# Altium PCB Major Buzz Kill.PcbDoc (part 2 of 3)
Units mm, origin at the board's own origin, x right, y up, seen from the top; angles counter-clockwise.
Board outline 59.06 x 78.97 mm, 2 copper layers (Top Layer, Bottom Layer); 83 components, 53 nets, 219 pads, 224 vias.
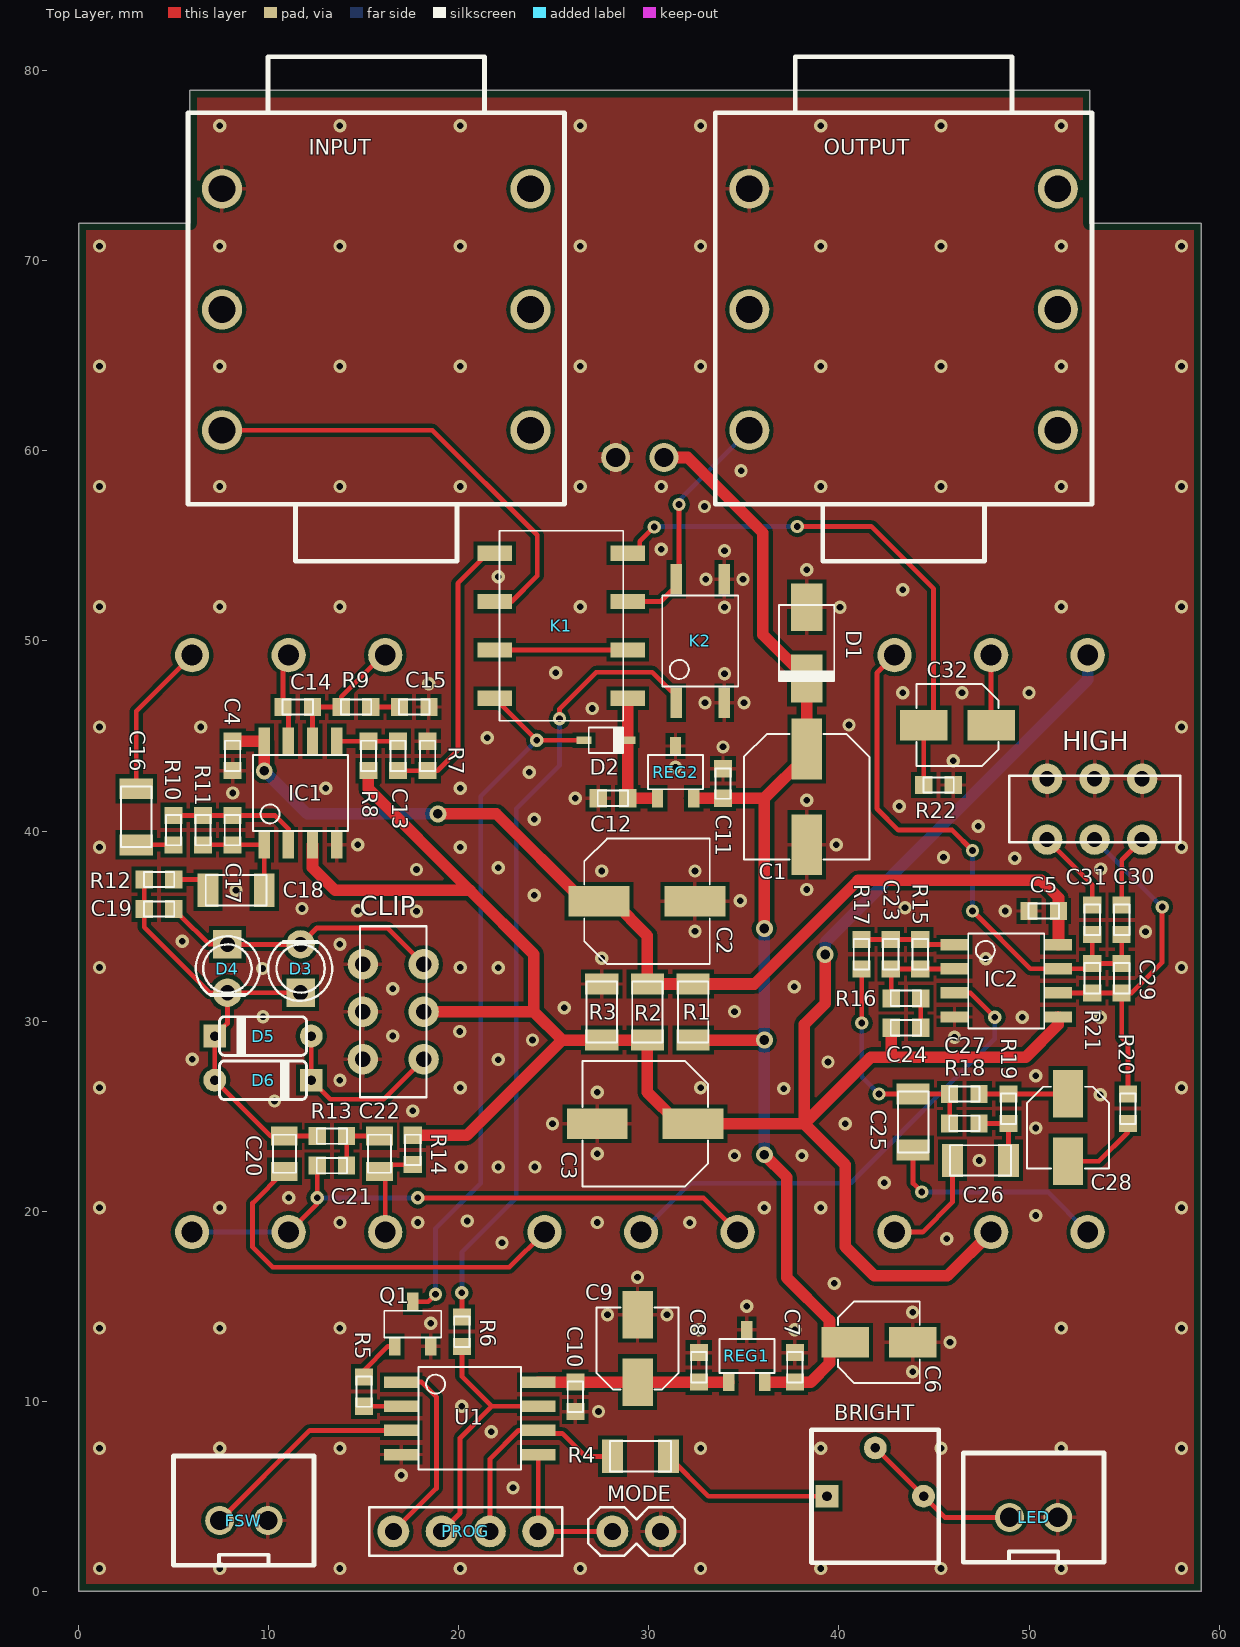
[diagram p0: Top Layer view]

## Part data (continued)
IC1 IC2: library part TL072CDT, "IC OPAMP JFET 4MHZ 8SO", Case/Package=SOIC, Dual Supply Voltage=9V, Input Bias Current=200pA, Input Offset Voltage (Vos)=10mV, Manufacturer=STMicroelectronics, Max Dual Supply Voltage=18V, Max Operating Temperature=70°C, Max Supply Voltage=36V, Min Dual Supply Voltage=3V, Min Operating Temperature=0°C, Min Supply Voltage=6V, Nominal Supply Current=2.5mA, Operating Supply Current=1.4mA, Output Current=40mA, Package Quantity=1, Supplier Part Number 1=1467663, Voltage Gain=106.02dB, Bandwidth=4MHz, Common Mode Rejection Ratio=70dB, ComponentLink1Description=https://datasheet.ciiva.com/15129/getdatasheetpartid-40113-15129688.pdf?src-supplier=Verical, ComponentLink1URL=https://datasheet.ciiva.com/15129/getdatasheetpartid-40113-15129688.pdf?src-supplier=Verical, ComponentLink2Description=https://datasheet.ciiva.com/29306/155616-da-01-en-op-verst-tl072cdt-stm-29306849.pdf?src-supplier=Conrad, ComponentLink2URL=https://datasheet.ciiva.com/29306/155616-da-01-en-op-verst-tl072cdt-stm-29306849.pdf?src-supplier=Conrad, ComponentLink3Description=https://datasheet.ciiva.com/26847/tl072cdt-26847276.pdf?src-supplier=IIIC, ComponentLink3URL=https://datasheet.ciiva.com/26847/tl072cdt-26847276.pdf?src-supplier=IIIC, ComponentLink4Description=https://datasheet.ciiva.com/1795/cd00000490-1795664.pdf?src-supplier=Digi-Key, ComponentLink4URL=https://datasheet.ciiva.com/1795/cd00000490-1795664.pdf?src-supplier=Digi-Key, ComponentLink5Description=https://datasheet.ciiva.com/1795/cd00000490-1795665.pdf?src-supplier=Digi-Key, ComponentLink5URL=https://datasheet.ciiva.com/1795/cd00000490-1795665.pdf?src-supplier=Digi-Key, ComponentLink6Description=https://datasheet.ciiva.com/1795/cd00000490-1795666.pdf?src-supplier=Digi-Key, ComponentLink6URL=https://datasheet.ciiva.com/1795/cd00000490-1795666.pdf?src-supplier=Digi-Key, ComponentLink7Description=https://datasheet.ciiva.com/8008/1674510-8008556.pdf?src-supplier=Element14, ComponentLink7URL=https://datasheet.ciiva.com/8008/1674510-8008556.pdf?src-supplier=Element14, ComponentLink8Description=https://datasheet.ciiva.com/14151/tl072-tl072a-tl072b-st-tds-eng-14151196.pdf?src-supplier=Distrelec, ComponentLink8URL=https://datasheet.ciiva.com/14151/tl072-tl072a-tl072b-st-tds-eng-14151196.pdf?src-supplier=Distrelec, ComponentLink9Description=https://datasheet.ciiva.com/8008/1674510-8008557.pdf?src-supplier=Element14, ComponentLink9URL=https://datasheet.ciiva.com/8008/1674510-8008557.pdf?src-supplier=Element14, Contact Plating=Tin, Gain Bandwidth Product=4MHz, Height=1.25mm, Lead Free="Lead Free", Length=4.9mm, Manufacturer Part Number=TL072CDT, Mount="Surface Mount", Number of Amplifiers=2, Number of Channels=2, Number of Circuits=2, Number of Elements=2, Number of Pins=8, Operating Supply Voltage=18V, Output Current per Channel=40mA, Packaging="Tape and Reel", Price=0.351, Pricing="5=0.351, 50=0.313, 100=0.188, 500=0.167, 1000=0.145 (EUR)", Radiation Hardening=No, REACH SVHC="No SVHC", RoHS=Yes, Slew Rate=16V/µs, Stock=1760, Supplier 1=Farnell, Unity Gain Bandwidth Product=4MHz, Weight=0.01lb, Width=3.9mm
INPUT OUTPUT: "6.35mm stereo insulated socket jack PCB mounted", Price=0.5
K1: library part G6K-2F5DC, "OMRON - G6K-2F 5DC - RELAY, SIGNAL, DPDT, 30VDC, 1A", Case/Package=SMD/SMT, Coil Current=21.1mA, Coil Power=100mW, Coil Resistance=237R, Coil Voltage (DC)=5V, Contact Current Rating=1A, Contact Resistance=100mR, Insulation Resistance=1GR, Manufacturer=Cliff, Max Operating Temperature=70°C, Min Operating Temperature=-40°C, Supplier Part Number 1=4446185, Coil Type=Non-Latching, ComponentLink1Description=https://datasheet.ciiva.com/1524/1702879-1524968.pdf?src-supplier=Element14, ComponentLink1URL=https://datasheet.ciiva.com/1524/1702879-1524968.pdf?src-supplier=Element14, Contact Material=Gold, Current Rating=21.1mA, Depth=7.8mm, Height=5.2mm, Length=10mm, Manufacturer Part Number=G6K-2F5DC, Mount=PCB, Number of Poles=2, Power Rating=100mW, Price=2.68, REACH SVHC=Unknown, Release Time=1.3ms, RoHS=Yes, Stock=0, Supplier 1=Farnell, Termination=SMD/SMT, Width=10mm
K2: "Toshiba TLP175A AC Input MOSFET Output Optocoupler, Surface Mount, 4-Pin SOIC", Case/Package=SOIC, Isolation Voltage=3.75kV, Manufacturer=Toshiba, Max Input Current=80mA, Supplier Part Number 1=2524257, ComponentLink1Description=http://www.farnell.com/datasheets/2017792.pdf?src-supplier=Farnell, ComponentLink1URL=http://www.farnell.com/datasheets/2017792.pdf?src-supplier=Farnell, ComponentLink2Description=http://uk.rs-online.com/webdocs/129d/0900766b8129d5be.pdf?src-supplier=RSComponents, ComponentLink2URL=http://uk.rs-online.com/webdocs/129d/0900766b8129d5be.pdf?src-supplier=RSComponents, ComponentLink3Description=http://www.farnell.com/datasheets/2017792.pdf?src-supplier=Element14, ComponentLink3URL=http://www.farnell.com/datasheets/2017792.pdf?src-supplier=Element14, ComponentLink4Description=http://www.farnell.com/datasheets/2017792.pdf?src-supplier=Newark, ComponentLink4URL=http://www.farnell.com/datasheets/2017792.pdf?src-supplier=Newark, Fall Time=1ms, Manufacturer Part Number=TLP175A, Mount="Surface Mount", Number of Channels=1, Number of Pins=4, Price=0.829, Pricing="5=0.877, 25=0.717, 100=0.597, 250=0.546, 500=0.49, 1000=0.441 (EUR)", REACH SVHC=Unknown, Rise Time=1ms, RoHS=No, Stock=0, Supplier 1=Farnell
MODE: "2 Pins male header", Pin spacing=2.54mm, Price=0.01
PROG: "4 Pins female header", Pin spacing=2.54mm, Price=0.01
Q1: library part MMBT3904LT1G, "TRANS NPN 40V 0.2A SOT23", Case/Package=SOT-23-3, Collector Base Voltage (VCBO)=60V, Collector Emitter Breakdown Voltage=40V, Collector Emitter Saturation Voltage=300mV, Current Rating=200mA, Emitter Base Voltage (VEBO)=6V, Frequency=300MHz, Manufacturer="ON Semiconductor", Max Operating Temperature=150°C, Max Power Dissipation=300mW, Min Operating Temperature=-55°C, Package Quantity=1, Supplier Part Number 1=1459100, Collector Emitter Voltage (VCEO)=40V, ComponentLink1Description=https://datasheet.ciiva.com/16199/mmbt3904lt1-d-16199009.pdf?src-supplier=Future+Electronics, ComponentLink1URL=https://datasheet.ciiva.com/16199/mmbt3904lt1-d-16199009.pdf?src-supplier=Future+Electronics, ComponentLink2Description=https://datasheet.ciiva.com/4723/mmbt3904lt1-d-113169-4723050.pdf?src-supplier=Mouser, ComponentLink2URL=https://datasheet.ciiva.com/4723/mmbt3904lt1-d-113169-4723050.pdf?src-supplier=Mouser, ComponentLink3Description=https://datasheet.ciiva.com/15138/getdatasheetpartid-53263-15138779.pdf?src-supplier=Verical, ComponentLink3URL=https://datasheet.ciiva.com/15138/getdatasheetpartid-53263-15138779.pdf?src-supplier=Verical, ComponentLink4Description=https://datasheet.ciiva.com/976/mmbt3904lt1-d-976362.pdf?src-supplier=Digi-Key, ComponentLink4URL=https://datasheet.ciiva.com/976/mmbt3904lt1-d-976362.pdf?src-supplier=Digi-Key, ComponentLink5Description=https://datasheet.ciiva.com/16478/mmbt3904lt1-d-16478538.pdf?src-supplier=Avnet+Asia, ComponentLink5URL=https://datasheet.ciiva.com/16478/mmbt3904lt1-d-16478538.pdf?src-supplier=Avnet+Asia, ComponentLink6Description=https://datasheet.ciiva.com/976/mmbt3904lt1-d-976363.pdf?src-supplier=Digi-Key, ComponentLink6URL=https://datasheet.ciiva.com/976/mmbt3904lt1-d-976363.pdf?src-supplier=Digi-Key, ComponentLink7Description=https://datasheet.ciiva.com/11199/mmbt3904lt1-d-11199003.pdf?src-supplier=Avnet, ComponentLink7URL=https://datasheet.ciiva.com/11199/mmbt3904lt1-d-11199003.pdf?src-supplier=Avnet, ComponentLink8Description=https://datasheet.ciiva.com/976/mmbt3904lt1-d-976364.pdf?src-supplier=Digi-Key, ComponentLink8URL=https://datasheet.ciiva.com/976/mmbt3904lt1-d-976364.pdf?src-supplier=Digi-Key, ComponentLink9Description=https://datasheet.ciiva.com/14546/70099530-14546188.pdf?src-supplier=Allied+Electronics, ComponentLink9URL=https://datasheet.ciiva.com/14546/70099530-14546188.pdf?src-supplier=Allied+Electronics, ComponentLink10Description=https://datasheet.ciiva.com/7972/1708269-7972381.pdf?src-supplier=Element14, ComponentLink10URL=https://datasheet.ciiva.com/7972/1708269-7972381.pdf?src-supplier=Element14, ComponentLink11Description=https://datasheet.ciiva.com/22664/1708269-22664159.pdf?src-supplier=Element14, ComponentLink11URL=https://datasheet.ciiva.com/22664/1708269-22664159.pdf?src-supplier=Element14, Contact Plating=Tin, Element Configuration=Single, Gain Bandwidth Product=300MHz, Height=0.94mm, hFE Min=100, Lead Free="Lead Free", Length=2.9mm, Manufacturer Part Number=MMBT3904LT1G, Max Breakdown Voltage=40V, Max Collector Current=200mA, Max Frequency=300MHz, Number of Elements=1, Number of Pins=3, Packaging="Tape and Reel", Polarity=NPN, Power Dissipation=300mW, Price=0.041, Pricing="5=0.119, 50=0.115, 100=0.0414, 500=0.0258, 1500=0.0247 (EUR)", Radiation Hardening=No, REACH SVHC="No SVHC", RoHS=Yes, Stock=165506, Supplier 1=Farnell, Transition Frequency=300MHz, Type="General Purpose", Voltage Rating (DC)=40V, Width=1.3mm
R1: library part CRCW120647R0FKEA, "RES SMD 47 OHM 1% 1/4W 1206", Case/Package=1206, Case Code (Metric)=3216, Manufacturer=Vishay, Max Operating Temperature=155°C, Max Power Dissipation=250mW, Min Operating Temperature=-55°C, Package Quantity=10, Supplier Part Number 1=1470017, Temperature Coefficient=100ppm/°C, Tolerance=1%, Voltage Rating=200V, Case Code (Imperial)=1206, ComponentLink1Description=https://datasheet.ciiva.com/11818/0900766b80d98b5e-11818252.pdf?src-supplier=RSComponents, ComponentLink1URL=https://datasheet.ciiva.com/11818/0900766b80d98b5e-11818252.pdf?src-supplier=RSComponents, ComponentLink2Description=https://datasheet.ciiva.com/2469/dcrcwe3-2469056.pdf?src-supplier=Digi-Key, ComponentLink2URL=https://datasheet.ciiva.com/2469/dcrcwe3-2469056.pdf?src-supplier=Digi-Key, ComponentLink3Description=https://datasheet.ciiva.com/16760/70201119-16760313.pdf?src-supplier=Allied+Electronics, ComponentLink3URL=https://datasheet.ciiva.com/16760/70201119-16760313.pdf?src-supplier=Allied+Electronics, ComponentLink4Description=https://datasheet.ciiva.com/9005/dcrcwe3-9005498.pdf?src-supplier=Avnet, ComponentLink4URL=https://datasheet.ciiva.com/9005/dcrcwe3-9005498.pdf?src-supplier=Avnet, ComponentLink5Description=https://datasheet.ciiva.com/2469/dcrcwe3-2469054.pdf?src-supplier=Digi-Key, ComponentLink5URL=https://datasheet.ciiva.com/2469/dcrcwe3-2469054.pdf?src-supplier=Digi-Key, ComponentLink6Description=https://datasheet.ciiva.com/9005/dcrcwe3-9005502.pdf?src-supplier=Avnet, ComponentLink6URL=https://datasheet.ciiva.com/9005/dcrcwe3-9005502.pdf?src-supplier=Avnet, ComponentLink7Description=https://datasheet.ciiva.com/16435/dcrcw-16435790.pdf?src-supplier=Future+Electronics, ComponentLink7URL=https://datasheet.ciiva.com/16435/dcrcw-16435790.pdf?src-supplier=Future+Electronics, ComponentLink8Description=https://datasheet.ciiva.com/16894/dcrcwe3-16894718.pdf?src-supplier=Avnet+Europe, ComponentLink8URL=https://datasheet.ciiva.com/16894/dcrcwe3-16894718.pdf?src-supplier=Avnet+Europe, ComponentLink9Description=https://datasheet.ciiva.com/7777/1697337-7777594.pdf?src-supplier=Element14, ComponentLink9URL=https://datasheet.ciiva.com/7777/1697337-7777594.pdf?src-supplier=Element14, ComponentLink10Description=https://datasheet.ciiva.com/15159/getdatasheetpartid-67741-15159676.pdf?src-supplier=Verical, ComponentLink10URL=https://datasheet.ciiva.com/15159/getdatasheetpartid-67741-15159676.pdf?src-supplier=Verical, ComponentLink11Description=https://datasheet.ciiva.com/2469/dcrcwe3-2469055.pdf?src-supplier=Digi-Key, ComponentLink11URL=https://datasheet.ciiva.com/2469/dcrcwe3-2469055.pdf?src-supplier=Digi-Key, Composition="Thick Film", Contact Plating=Tin, Depth=1.6mm, Features="Automotive AEC-Q200", Height=0.55mm, Lead Free="Lead Free", Length=3.2mm, Manufacturer Part Number=CRCW120647R0FKEA, Military Standard=Not, Mount="Surface Mount", Number of Terminations=2, Packaging="Tape and Reel", Power Rating=250mW, Price=0.0249, Pricing="10=0.0369, 100=0.0246, 500=0.0205, 1000=0.0135, 2500=0.0108 (EUR)", Radiation Hardening=No, REACH SVHC=Unknown, Resistance=47R, RoHS=Yes, Stock=90018, Supplier 1=Farnell, Termination=SMD/SMT, Voltage Rating (DC)=200V, Weight=0.000353oz, Width=0.063inch
R2 R3: library part CRCW120647K0FKEA, "RES SMD 47K OHM 1% 1/4W 1206", Case/Package=1206, Case Code (Metric)=3216, Manufacturer=Vishay, Max Operating Temperature=155°C, Max Power Dissipation=250mW, Min Operating Temperature=-55°C, Package Quantity=10, Resistance=47kR, Supplier Part Number 1=1470016, Temperature Coefficient=100ppm/°C, Tolerance=1%, Voltage Rating=200V, Case Code (Imperial)=1206, ComponentLink1Description=https://datasheet.ciiva.com/11809/0900766b80d98b5e-11809091.pdf?src-supplier=RSComponents, ComponentLink1URL=https://datasheet.ciiva.com/11809/0900766b80d98b5e-11809091.pdf?src-supplier=RSComponents, ComponentLink2Description=https://datasheet.ciiva.com/16894/dcrcwe3-16894709.pdf?src-supplier=Avnet+Europe, ComponentLink2URL=https://datasheet.ciiva.com/16894/dcrcwe3-16894709.pdf?src-supplier=Avnet+Europe, ComponentLink3Description=https://datasheet.ciiva.com/26316/fld-crcw-e3-data-en-26316470.pdf?src-supplier=Distrelec, ComponentLink3URL=https://datasheet.ciiva.com/26316/fld-crcw-e3-data-en-26316470.pdf?src-supplier=Distrelec, ComponentLink4Description=https://datasheet.ciiva.com/7777/1697337-7777591.pdf?src-supplier=Element14, ComponentLink4URL=https://datasheet.ciiva.com/7777/1697337-7777591.pdf?src-supplier=Element14, ComponentLink5Description=https://datasheet.ciiva.com/7777/125364-7777592.pdf?src-supplier=Element14, ComponentLink5URL=https://datasheet.ciiva.com/7777/125364-7777592.pdf?src-supplier=Element14, ComponentLink6Description=https://datasheet.ciiva.com/16380/dcrcwe3-16380760.pdf?src-supplier=Future+Electronics, ComponentLink6URL=https://datasheet.ciiva.com/16380/dcrcwe3-16380760.pdf?src-supplier=Future+Electronics, ComponentLink7Description=https://datasheet.ciiva.com/2468/dcrcwe3-2468922.pdf?src-supplier=Digi-Key, ComponentLink7URL=https://datasheet.ciiva.com/2468/dcrcwe3-2468922.pdf?src-supplier=Digi-Key, ComponentLink8Description=https://datasheet.ciiva.com/2468/dcrcwe3-2468923.pdf?src-supplier=Digi-Key, ComponentLink8URL=https://datasheet.ciiva.com/2468/dcrcwe3-2468923.pdf?src-supplier=Digi-Key, ComponentLink9Description=https://datasheet.ciiva.com/2468/dcrcwe3-2468924.pdf?src-supplier=Digi-Key, ComponentLink9URL=https://datasheet.ciiva.com/2468/dcrcwe3-2468924.pdf?src-supplier=Digi-Key, ComponentLink10Description=https://datasheet.ciiva.com/7777/1697337-7777484.pdf?src-supplier=Element14, ComponentLink10URL=https://datasheet.ciiva.com/7777/1697337-7777484.pdf?src-supplier=Element14, ComponentLink11Description=https://datasheet.ciiva.com/22868/70201119-22868605.pdf?src-supplier=Allied+Electronics, ComponentLink11URL=https://datasheet.ciiva.com/22868/70201119-22868605.pdf?src-supplier=Allied+Electronics, ComponentLink12Description=https://datasheet.ciiva.com/9006/dcrcwe3-9006431.pdf?src-supplier=Avnet, ComponentLink12URL=https://datasheet.ciiva.com/9006/dcrcwe3-9006431.pdf?src-supplier=Avnet, Composition="Thick Film", Contact Plating=Tin, Depth=1.6mm, Features="Automotive AEC-Q200", Height=0.55mm, Lead Free="Lead Free", Length=3.2mm, Manufacturer Part Number=CRCW120647K0FKEA, Military Standard=Not, Number of Terminations=2, Packaging="Tape and Reel", Power Rating=250mW, Price=0.028, Pricing="10=0.0415, 100=0.0276, 500=0.0231, 1000=0.0135, 2500=0.0116 (EUR)", Radiation Hardening=No, REACH SVHC=Unknown, RoHS=Yes, Stock=31528, Supplier 1=Farnell, Termination=SMD/SMT, Voltage Rating (DC)=200V, Weight=0.000353oz, Width=1.6mm
R4: library part CRCW1206220RFKEA, "RES SMD 220 OHM 1% 1/4W 1206", Case/Package=1206, Case Code (Metric)=3216, Manufacturer=Vishay, Max Operating Temperature=155°C, Max Power Dissipation=250mW, Min Operating Temperature=-55°C, Package Quantity=10, Supplier Part Number 1=2139380, Temperature Coefficient=100ppm/°C, Tolerance=1%, Voltage Rating=200V, Case Code (Imperial)=1206, ComponentLink1Description=https://datasheet.ciiva.com/5550/dcrcwe3-109170-5550679.pdf?src-supplier=Mouser, ComponentLink1URL=https://datasheet.ciiva.com/5550/dcrcwe3-109170-5550679.pdf?src-supplier=Mouser, ComponentLink2Description=https://datasheet.ciiva.com/17166/dcrcwe3-17166378.pdf?src-supplier=Avnet+Europe, ComponentLink2URL=https://datasheet.ciiva.com/17166/dcrcwe3-17166378.pdf?src-supplier=Avnet+Europe, ComponentLink3Description=https://datasheet.ciiva.com/2515/dcrcwe3-2515580.pdf?src-supplier=Digi-Key, ComponentLink3URL=https://datasheet.ciiva.com/2515/dcrcwe3-2515580.pdf?src-supplier=Digi-Key, ComponentLink4Description=https://datasheet.ciiva.com/2515/dcrcwe3-2515581.pdf?src-supplier=Digi-Key, ComponentLink4URL=https://datasheet.ciiva.com/2515/dcrcwe3-2515581.pdf?src-supplier=Digi-Key, ComponentLink5Description=https://datasheet.ciiva.com/2515/dcrcwe3-2515582.pdf?src-supplier=Digi-Key, ComponentLink5URL=https://datasheet.ciiva.com/2515/dcrcwe3-2515582.pdf?src-supplier=Digi-Key, ComponentLink6Description=https://datasheet.ciiva.com/8957/dcrcwe3-8957438.pdf?src-supplier=Avnet, ComponentLink6URL=https://datasheet.ciiva.com/8957/dcrcwe3-8957438.pdf?src-supplier=Avnet, ComponentLink7Description=https://datasheet.ciiva.com/22700/1697337-22700367.pdf?src-supplier=Element14, ComponentLink7URL=https://datasheet.ciiva.com/22700/1697337-22700367.pdf?src-supplier=Element14, ComponentLink8Description=https://datasheet.ciiva.com/26317/fld-crcw-e3-data-en-26317129.pdf?src-supplier=Distrelec, ComponentLink8URL=https://datasheet.ciiva.com/26317/fld-crcw-e3-data-en-26317129.pdf?src-supplier=Distrelec, ComponentLink9Description=https://datasheet.ciiva.com/7800/dcrcwe3-7800651.pdf?src-supplier=Element14, ComponentLink9URL=https://datasheet.ciiva.com/7800/dcrcwe3-7800651.pdf?src-supplier=Element14, ComponentLink10Description=https://datasheet.ciiva.com/22675/1912744-22675103.pdf?src-supplier=Element14, ComponentLink10URL=https://datasheet.ciiva.com/22675/1912744-22675103.pdf?src-supplier=Element14, Composition="Thick Film", Contact Plating=Tin, Depth=1.6mm, Features="Automotive AEC-Q200", Height=0.55mm, Lead Free="Lead Free", Length=3.2mm, Manufacturer Part Number=CRCW1206220RFKEA, Military Standard=Not, Mount="Surface Mount", Number of Terminations=2, Packaging="Tape and Reel", Power Rating=250mW, Price=0.028, Pricing="10=0.0415, 100=0.0276, 500=0.0231, 1000=0.0135, 2500=0.0116 (EUR)", Radiation Hardening=No, REACH SVHC=Unknown, Resistance=220R, RoHS=Yes, Stock=47111, Supplier 1=Farnell, Termination=SMD/SMT, Voltage Rating (DC)=200V, Weight=0.000353oz, Width=1.6mm
R5: library part CRCW060322K0FKEA, "RES SMD 22K OHM 1% 1/10W 0603", Case/Package=0603, Case Code (Metric)=1608, Manufacturer=Vishay, Max Operating Temperature=155°C, Max Power Dissipation=100mW, Min Operating Temperature=-55°C, Package Quantity=10, Resistance=22kR, Supplier Part Number 1=1469779, Temperature Coefficient=100ppm/°C, Tolerance=1%, Voltage Rating=75V, Case Code (Imperial)=0603, ComponentLink1Description=https://datasheet.ciiva.com/11818/0900766b80d98afc-11818177.pdf?src-supplier=RSComponents, ComponentLink1URL=https://datasheet.ciiva.com/11818/0900766b80d98afc-11818177.pdf?src-supplier=RSComponents, ComponentLink2Description=https://datasheet.ciiva.com/15159/getdatasheetpartid-32846-15159349.pdf?src-supplier=Verical, ComponentLink2URL=https://datasheet.ciiva.com/15159/getdatasheetpartid-32846-15159349.pdf?src-supplier=Verical, ComponentLink3Description=https://datasheet.ciiva.com/2466/dcrcwe3-2466263.pdf?src-supplier=Digi-Key, ComponentLink3URL=https://datasheet.ciiva.com/2466/dcrcwe3-2466263.pdf?src-supplier=Digi-Key, ComponentLink4Description=https://datasheet.ciiva.com/7672/1697337-7672871.pdf?src-supplier=Element14, ComponentLink4URL=https://datasheet.ciiva.com/7672/1697337-7672871.pdf?src-supplier=Element14, ComponentLink5Description=https://datasheet.ciiva.com/2466/dcrcwe3-2466264.pdf?src-supplier=Digi-Key, ComponentLink5URL=https://datasheet.ciiva.com/2466/dcrcwe3-2466264.pdf?src-supplier=Digi-Key, ComponentLink6Description=https://datasheet.ciiva.com/7673/1720486-7673144.pdf?src-supplier=Element14, ComponentLink6URL=https://datasheet.ciiva.com/7673/1720486-7673144.pdf?src-supplier=Element14, ComponentLink7Description=https://datasheet.ciiva.com/16427/dcrcwe3-16427336.pdf?src-supplier=Future+Electronics, ComponentLink7URL=https://datasheet.ciiva.com/16427/dcrcwe3-16427336.pdf?src-supplier=Future+Electronics, ComponentLink8Description=https://datasheet.ciiva.com/16893/dcrcwe3-16893896.pdf?src-supplier=Avnet+Europe, ComponentLink8URL=https://datasheet.ciiva.com/16893/dcrcwe3-16893896.pdf?src-supplier=Avnet+Europe, ComponentLink9Description=https://datasheet.ciiva.com/2466/dcrcwe3-2466265.pdf?src-supplier=Digi-Key, ComponentLink9URL=https://datasheet.ciiva.com/2466/dcrcwe3-2466265.pdf?src-supplier=Digi-Key, ComponentLink10Description=https://datasheet.ciiva.com/8339/dcrcwe3-8339961.pdf?src-supplier=Avnet, ComponentLink10URL=https://datasheet.ciiva.com/8339/dcrcwe3-8339961.pdf?src-supplier=Avnet, ComponentLink11Description=https://datasheet.ciiva.com/16767/70201119-16767417.pdf?src-supplier=Allied+Electronics, ComponentLink11URL=https://datasheet.ciiva.com/16767/70201119-16767417.pdf?src-supplier=Allied+Electronics, ComponentLink12Description=https://datasheet.ciiva.com/26314/fld-crcw-e3-data-en-26314666.pdf?src-supplier=Distrelec, ComponentLink12URL=https://datasheet.ciiva.com/26314/fld-crcw-e3-data-en-26314666.pdf?src-supplier=Distrelec, Composition="Thick Film", Contact Plating=Tin, Depth=0.85mm, Features="Automotive AEC-Q200", Height=0.45mm, Lead Free="Lead Free", Length=1.55mm, Manufacturer Part Number=CRCW060322K0FKEA, Military Standard=Not, Mount="Surface Mount", Number of Terminations=2, Packaging="Tape and Reel", Power Rating=100mW, Price=0.013, Pricing="10=0.0169, 100=0.013, 500=0.0113, 1000=0.008 (EUR)", Radiation Hardening=No, REACH SVHC=Unknown, RoHS=Yes, Stock=139047, Supplier 1=Farnell, Termination=SMD/SMT, Voltage Rating (DC)=75V, Weight=7.1E-05oz, Width=0.85mm
R6 R14: library part CRCW06031K00FKEA, "RES SMD 1K OHM 1% 1/10W 0603", Case/Package=0603, Case Code (Metric)=1608, Manufacturer="Vishay Dale", Max Operating Temperature=155°C, Max Power Dissipation=100mW, Min Operating Temperature=-55°C, Package Quantity=10, Resistance=1kR, Supplier Part Number 1=1469740, Temperature Coefficient=100ppm/°C, Tolerance=1%, Voltage Rating=75V, Case Code (Imperial)=0603, ComponentLink1Description=https://datasheet.ciiva.com/11808/0900766b80d98afc-11808625.pdf?src-supplier=RSComponents, ComponentLink1URL=https://datasheet.ciiva.com/11808/0900766b80d98afc-11808625.pdf?src-supplier=RSComponents, ComponentLink2Description=https://datasheet.ciiva.com/2465/dcrcwe3-2465536.pdf?src-supplier=Digi-Key, ComponentLink2URL=https://datasheet.ciiva.com/2465/dcrcwe3-2465536.pdf?src-supplier=Digi-Key, ComponentLink3Description=https://datasheet.ciiva.com/8336/dcrcwe3-8336822.pdf?src-supplier=Avnet, ComponentLink3URL=https://datasheet.ciiva.com/8336/dcrcwe3-8336822.pdf?src-supplier=Avnet, ComponentLink4Description=https://datasheet.ciiva.com/16515/dcrcwe3-16515078.pdf?src-supplier=Avnet+Asia, ComponentLink4URL=https://datasheet.ciiva.com/16515/dcrcwe3-16515078.pdf?src-supplier=Avnet+Asia, ComponentLink5Description=https://datasheet.ciiva.com/46441/1720486-46441622.pdf?src-supplier=Element14, ComponentLink5URL=https://datasheet.ciiva.com/46441/1720486-46441622.pdf?src-supplier=Element14, ComponentLink6Description=https://datasheet.ciiva.com/26316/fld-crcw-e3-data-en-26316551.pdf?src-supplier=Distrelec, ComponentLink6URL=https://datasheet.ciiva.com/26316/fld-crcw-e3-data-en-26316551.pdf?src-supplier=Distrelec, ComponentLink7Description=https://datasheet.ciiva.com/46441/1720486-46441623.pdf?src-supplier=Element14, ComponentLink7URL=https://datasheet.ciiva.com/46441/1720486-46441623.pdf?src-supplier=Element14, ComponentLink8Description=https://datasheet.ciiva.com/46385/1697337-46385497.pdf?src-supplier=Element14, ComponentLink8URL=https://datasheet.ciiva.com/46385/1697337-46385497.pdf?src-supplier=Element14, ComponentLink9Description=https://datasheet.ciiva.com/3257/dcrcwe3-3257132.pdf?src-supplier=Avnet, ComponentLink9URL=https://datasheet.ciiva.com/3257/dcrcwe3-3257132.pdf?src-supplier=Avnet, ComponentLink10Description=https://datasheet.ciiva.com/16199/dcrcwe3-16199053.pdf?src-supplier=Future+Electronics, ComponentLink10URL=https://datasheet.ciiva.com/16199/dcrcwe3-16199053.pdf?src-supplier=Future+Electronics, ComponentLink11Description=https://datasheet.ciiva.com/2465/dcrcwe3-2465534.pdf?src-supplier=Digi-Key, ComponentLink11URL=https://datasheet.ciiva.com/2465/dcrcwe3-2465534.pdf?src-supplier=Digi-Key, ComponentLink12Description=https://datasheet.ciiva.com/16893/dcrcwe3-16893742.pdf?src-supplier=Avnet+Europe, ComponentLink12URL=https://datasheet.ciiva.com/16893/dcrcwe3-16893742.pdf?src-supplier=Avnet+Europe, ComponentLink13Description=https://datasheet.ciiva.com/2465/dcrcwe3-2465535.pdf?src-supplier=Digi-Key, ComponentLink13URL=https://datasheet.ciiva.com/2465/dcrcwe3-2465535.pdf?src-supplier=Digi-Key, Composition="Thick Film", Contact Plating=Tin, Depth=0.85mm, Features="Automotive AEC-Q200", Height=0.45mm, Lead Free="Lead Free", Length=1.55mm, Manufacturer Part Number=CRCW06031K00FKEA, Military Standard=Not, Mount="Surface Mount", Number of Pins=2, Number of Terminations=2, Packaging="Tape and Reel", Power Rating=100mW, Price=0.013, Pricing="10=0.017, 100=0.0131, 500=0.0114, 1000=0.008, 2500=0.0061 (EUR)", Radiation Hardening=No, REACH SVHC=Unknown, RoHS=Yes, Stock=1083345, Supplier 1=Farnell, Termination=SMD/SMT, Voltage Rating (DC)=75V, Weight=7.1E-05oz, Width=0.033inch
R7: library part CRCW060310M0FKEA, "RES SMD 10M OHM 1% 1/10W 0603", Case/Package=0603, Case Code (Metric)=1608, Manufacturer=Vishay, Max Operating Temperature=155°C, Min Operating Temperature=-55°C, Package Quantity=5000, Power Rating=100mW, Resistance=10MR, Supplier Part Number 1=1469750, Temperature Coefficient=100ppm/°C, Tolerance=1%, Voltage Rating=75V, Case Code (Imperial)=0603, ComponentLink1Description=https://datasheet.ciiva.com/11808/0900766b80d98afc-11808549.pdf?src-supplier=RSComponents, ComponentLink1URL=https://datasheet.ciiva.com/11808/0900766b80d98afc-11808549.pdf?src-supplier=RSComponents, ComponentLink2Description=https://datasheet.ciiva.com/26314/fld-crcw-e3-data-en-26314629.pdf?src-supplier=Distrelec, ComponentLink2URL=https://datasheet.ciiva.com/26314/fld-crcw-e3-data-en-26314629.pdf?src-supplier=Distrelec, ComponentLink3Description=https://datasheet.ciiva.com/7673/1697337-7673286.pdf?src-supplier=Element14, ComponentLink3URL=https://datasheet.ciiva.com/7673/1697337-7673286.pdf?src-supplier=Element14, ComponentLink4Description=https://datasheet.ciiva.com/3256/dcrcwe3-3256951.pdf?src-supplier=Avnet, ComponentLink4URL=https://datasheet.ciiva.com/3256/dcrcwe3-3256951.pdf?src-supplier=Avnet, ComponentLink5Description=https://datasheet.ciiva.com/3256/dcrcwe3-3256952.pdf?src-supplier=Avnet, ComponentLink5URL=https://datasheet.ciiva.com/3256/dcrcwe3-3256952.pdf?src-supplier=Avnet, ComponentLink6Description=https://datasheet.ciiva.com/16941/dcrcwe3-16941336.pdf?src-supplier=Avnet+Europe, ComponentLink6URL=https://datasheet.ciiva.com/16941/dcrcwe3-16941336.pdf?src-supplier=Avnet+Europe, ComponentLink7Description=https://datasheet.ciiva.com/16786/70201119-16786489.pdf?src-supplier=Allied+Electronics, ComponentLink7URL=https://datasheet.ciiva.com/16786/70201119-16786489.pdf?src-supplier=Allied+Electronics, ComponentLink8Description=https://datasheet.ciiva.com/5543/dcrcwe3-109170-5543450.pdf?src-supplier=Mouser, ComponentLink8URL=https://datasheet.ciiva.com/5543/dcrcwe3-109170-5543450.pdf?src-supplier=Mouser, ComponentLink9Description=https://datasheet.ciiva.com/7673/1720486-7673454.pdf?src-supplier=Element14, ComponentLink9URL=https://datasheet.ciiva.com/7673/1720486-7673454.pdf?src-supplier=Element14, ComponentLink10Description=https://datasheet.ciiva.com/16200/dcrcwe3-16200110.pdf?src-supplier=Future+Electronics, ComponentLink10URL=https://datasheet.ciiva.com/16200/dcrcwe3-16200110.pdf?src-supplier=Future+Electronics, ComponentLink11Description=https://datasheet.ciiva.com/16515/dcrcwe3-16515022.pdf?src-supplier=Avnet+Asia, ComponentLink11URL=https://datasheet.ciiva.com/16515/dcrcwe3-16515022.pdf?src-supplier=Avnet+Asia, Composition="Thick Film", Contact Plating=Tin, Depth=0.85mm, Height=0.45mm, Lead Free="Lead Free", Length=1.55mm, Manufacturer Part Number=CRCW060310M0FKEA, Military Standard=Not, Mount="Surface Mount", Number of Terminations=2, Packaging="Tape and Reel", Price=0.0093, Pricing="10=0.0112, 100=0.0092, 500=0.0084, 1000=0.0075 (EUR)", Radiation Hardening=No, REACH SVHC=Unknown, RoHS=Yes, Stock=59739, Supplier 1=Farnell, Termination=SMD/SMT, Voltage Rating (DC)=75V, Weight=7.1E-05oz, Width=0.85mm, Working Voltage=75V
R8 R22: library part CRCW06031M00FKEA, "RES SMD 1M OHM 1% 1/10W 0603", Case/Package=0603, Case Code (Metric)=1608, Manufacturer=Vishay, Max Operating Temperature=155°C, Max Power Dissipation=100mW, Min Operating Temperature=-55°C, Package Quantity=10, Resistance=1MR, Supplier Part Number 1=1469746, Temperature Coefficient=100ppm/°C, Tolerance=1%, Voltage Rating=75V, Case Code (Imperial)=0603, ComponentLink1Description=https://datasheet.ciiva.com/11809/0900766b80d98afc-11809074.pdf?src-supplier=RSComponents, ComponentLink1URL=https://datasheet.ciiva.com/11809/0900766b80d98afc-11809074.pdf?src-supplier=RSComponents, ComponentLink2Description=https://datasheet.ciiva.com/26314/fld-crcw-e3-data-en-26314645.pdf?src-supplier=Distrelec, ComponentLink2URL=https://datasheet.ciiva.com/26314/fld-crcw-e3-data-en-26314645.pdf?src-supplier=Distrelec, ComponentLink3Description=https://datasheet.ciiva.com/2465/dcrcwe3-2465549.pdf?src-supplier=Digi-Key, ComponentLink3URL=https://datasheet.ciiva.com/2465/dcrcwe3-2465549.pdf?src-supplier=Digi-Key, ComponentLink4Description=https://datasheet.ciiva.com/16311/dcrcwe3-16311533.pdf?src-supplier=Future+Electronics, ComponentLink4URL=https://datasheet.ciiva.com/16311/dcrcwe3-16311533.pdf?src-supplier=Future+Electronics, ComponentLink5Description=https://datasheet.ciiva.com/2465/dcrcwe3-2465550.pdf?src-supplier=Digi-Key, ComponentLink5URL=https://datasheet.ciiva.com/2465/dcrcwe3-2465550.pdf?src-supplier=Digi-Key, ComponentLink6Description=https://datasheet.ciiva.com/7841/1720486-7841822.pdf?src-supplier=Element14, ComponentLink6URL=https://datasheet.ciiva.com/7841/1720486-7841822.pdf?src-supplier=Element14, ComponentLink7Description=https://datasheet.ciiva.com/2465/dcrcwe3-2465551.pdf?src-supplier=Digi-Key, ComponentLink7URL=https://datasheet.ciiva.com/2465/dcrcwe3-2465551.pdf?src-supplier=Digi-Key, ComponentLink8Description=https://datasheet.ciiva.com/7841/125364-7841823.pdf?src-supplier=Element14, ComponentLink8URL=https://datasheet.ciiva.com/7841/125364-7841823.pdf?src-supplier=Element14, Composition="Thick Film", Contact Plating=Tin, Depth=0.85mm, Features="Automotive AEC-Q200", Height=0.45mm, Lead Free="Lead Free", Length=1.55mm, Manufacturer Part Number=CRCW06031M00FKEA, Military Standard=Not, Mount="Surface Mount", Number of Pins=2, Number of Terminations=2, Packaging="Tape and Reel", Power Rating=100mW, Price=0.0131, Pricing="10=0.0169, 100=0.013, 500=0.0113, 1000=0.008 (EUR)", Radiation Hardening=No, REACH SVHC=Unknown, RoHS=Yes, Stock=118520, Supplier 1=Farnell, Termination=SMD/SMT, Voltage Rating (DC)=75V, Weight=7.1E-05oz, Width=0.85mm
R9: library part CRCW06033K30FKEA, "RES SMD 3.3K OHM 1% 1/10W 0603", Case/Package=0603, Case Code (Metric)=1608, Manufacturer=Vishay, Max Operating Temperature=155°C, Max Power Dissipation=100mW, Min Operating Temperature=-55°C, Package Quantity=10, Resistance=3.3kR, Supplier Part Number 1=1469793, Temperature Coefficient=100ppm/°C, Tolerance=1%, Voltage Rating=75V, Case Code (Imperial)=0603, ComponentLink1Description=https://datasheet.ciiva.com/11808/0900766b80d98afc-11808705.pdf?src-supplier=RSComponents, ComponentLink1URL=https://datasheet.ciiva.com/11808/0900766b80d98afc-11808705.pdf?src-supplier=RSComponents, ComponentLink2Description=https://datasheet.ciiva.com/26314/fld-crcw-e3-data-en-26314711.pdf?src-supplier=Distrelec, ComponentLink2URL=https://datasheet.ciiva.com/26314/fld-crcw-e3-data-en-26314711.pdf?src-supplier=Distrelec, ComponentLink3Description=https://datasheet.ciiva.com/7672/1720486-7672906.pdf?src-supplier=Element14, ComponentLink3URL=https://datasheet.ciiva.com/7672/1720486-7672906.pdf?src-supplier=Element14, ComponentLink4Description=https://datasheet.ciiva.com/7673/1720486-7673146.pdf?src-supplier=Element14, ComponentLink4URL=https://datasheet.ciiva.com/7673/1720486-7673146.pdf?src-supplier=Element14, ComponentLink5Description=https://datasheet.ciiva.com/16200/dcrcwe3-16200585.pdf?src-supplier=Future+Electronics, ComponentLink5URL=https://datasheet.ciiva.com/16200/dcrcwe3-16200585.pdf?src-supplier=Future+Electronics, ComponentLink6Description=https://datasheet.ciiva.com/16893/dcrcw-16893324.pdf?src-supplier=Avnet+Europe, ComponentLink6URL=https://datasheet.ciiva.com/16893/dcrcw-16893324.pdf?src-supplier=Avnet+Europe, Composition="Thick Film", Contact Plating=Tin, Depth=0.85mm, Features="Automotive AEC-Q200", Height=0.45mm, Lead Free="Lead Free", Length=1.55mm, Manufacturer Part Number=CRCW06033K30FKEA, Military Standard=Not, Mount="Surface Mount", Number of Terminations=2, Packaging="Tape and Reel", Power Rating=100mW, Price=0.0131, Pricing="10=0.0171, 100=0.0132, 500=0.0114, 1000=0.0068 (EUR)", Radiation Hardening=No, REACH SVHC=Unknown, RoHS=Yes, Stock=173901, Supplier 1=Farnell, Termination=SMD/SMT, Voltage Rating (DC)=75V, Weight=7.1E-05oz, Width=0.85mm, Working Voltage=75V
R10 R12: library part CRCW060310K0FKEA, "RES SMD 10K OHM 1% 1/10W 0603", Case/Package=0603, Case Code (Metric)=1608, Manufacturer=Vishay, Max Operating Temperature=155°C, Max Power Dissipation=100mW, Min Operating Temperature=-55°C, Package Quantity=10, Resistance=10kR, Supplier Part Number 1=1469748, Temperature Coefficient=100ppm/°C, Tolerance=1%, Voltage Rating=75V, Case Code (Imperial)=0603, ComponentLink1Description=https://datasheet.ciiva.com/11809/0900766b80d98afc-11809037.pdf?src-supplier=RSComponents, ComponentLink1URL=https://datasheet.ciiva.com/11809/0900766b80d98afc-11809037.pdf?src-supplier=RSComponents, ComponentLink2Description=https://datasheet.ciiva.com/16886/dcrcw-16886037.pdf?src-supplier=Avnet+Europe, ComponentLink2URL=https://datasheet.ciiva.com/16886/dcrcw-16886037.pdf?src-supplier=Avnet+Europe, ComponentLink3Description=https://datasheet.ciiva.com/26821/getdatasheetpartid-86831-26821109.pdf?src-supplier=Verical, ComponentLink3URL=https://datasheet.ciiva.com/26821/getdatasheetpartid-86831-26821109.pdf?src-supplier=Verical, ComponentLink4Description=https://datasheet.ciiva.com/16754/70201119-16754710.pdf?src-supplier=Allied+Electronics, ComponentLink4URL=https://datasheet.ciiva.com/16754/70201119-16754710.pdf?src-supplier=Allied+Electronics, ComponentLink5Description=https://datasheet.ciiva.com/16719/70201119-16719704.pdf?src-supplier=Allied+Electronics, ComponentLink5URL=https://datasheet.ciiva.com/16719/70201119-16719704.pdf?src-supplier=Allied+Electronics, ComponentLink6Description=https://datasheet.ciiva.com/2465/dcrcwe3-2465513.pdf?src-supplier=Digi-Key, ComponentLink6URL=https://datasheet.ciiva.com/2465/dcrcwe3-2465513.pdf?src-supplier=Digi-Key, ComponentLink7Description=https://datasheet.ciiva.com/5543/dcrcwe3-109170-5543001.pdf?src-supplier=Mouser, ComponentLink7URL=https://datasheet.ciiva.com/5543/dcrcwe3-109170-5543001.pdf?src-supplier=Mouser, ComponentLink8Description=https://datasheet.ciiva.com/2465/dcrcwe3-2465514.pdf?src-supplier=Digi-Key, ComponentLink8URL=https://datasheet.ciiva.com/2465/dcrcwe3-2465514.pdf?src-supplier=Digi-Key, ComponentLink9Description=https://datasheet.ciiva.com/46385/1697337-46385498.pdf?src-supplier=Element14, ComponentLink9URL=https://datasheet.ciiva.com/46385/1697337-46385498.pdf?src-supplier=Element14, ComponentLink10Description=https://datasheet.ciiva.com/2465/dcrcwe3-2465515.pdf?src-supplier=Digi-Key, ComponentLink10URL=https://datasheet.ciiva.com/2465/dcrcwe3-2465515.pdf?src-supplier=Digi-Key, ComponentLink11Description=https://datasheet.ciiva.com/3256/dcrcwe3-3256939.pdf?src-supplier=Avnet, ComponentLink11URL=https://datasheet.ciiva.com/3256/dcrcwe3-3256939.pdf?src-supplier=Avnet, ComponentLink12Description=https://datasheet.ciiva.com/3256/dcrcwe3-3256940.pdf?src-supplier=Avnet, ComponentLink12URL=https://datasheet.ciiva.com/3256/dcrcwe3-3256940.pdf?src-supplier=Avnet, ComponentLink13Description=https://datasheet.ciiva.com/16209/dcrcwe3-16209164.pdf?src-supplier=Future+Electronics, ComponentLink13URL=https://datasheet.ciiva.com/16209/dcrcwe3-16209164.pdf?src-supplier=Future+Electronics, ComponentLink14Description=https://datasheet.ciiva.com/26314/fld-crcw-e3-data-en-26314749.pdf?src-supplier=Distrelec, ComponentLink14URL=https://datasheet.ciiva.com/26314/fld-crcw-e3-data-en-26314749.pdf?src-supplier=Distrelec, Composition="Thick Film", Contact Plating=Tin, Depth=0.85mm, Features="Automotive AEC-Q200", Height=0.45mm, Lead Free="Lead Free", Length=1.55mm, Manufacturer Part Number=CRCW060310K0FKEA, Military Standard=Not, Number of Pins=2, Number of Terminations=2, Packaging="Tape and Reel", Power Rating=100mW, Price=0.0131, Pricing="10=0.0169, 100=0.013, 500=0.0113, 1000=0.008 (EUR)", Radiation Hardening=No, REACH SVHC=Unknown, RoHS=Yes, Stock=1391124, Supplier 1=Farnell, Termination=SMD/SMT, Voltage Rating (DC)=75V, Weight=7.1E-05oz, Width=0.033inch
R11: library part CRCW0603680KFKEA, "RES SMD 680K OHM 1% 1/10W 0603", Case/Package=0603, Case Code (Metric)=1608, Manufacturer=Vishay, Max Operating Temperature=155°C, Max Power Dissipation=100mW, Min Operating Temperature=-55°C, Package Quantity=10, Resistance=680kR, Supplier Part Number 1=2138587, Temperature Coefficient=100ppm/°C, Tolerance=1%, Voltage Rating=75V, Case Code (Imperial)=0603, ComponentLink1Description=https://datasheet.ciiva.com/11809/0900766b80d98afc-11809140.pdf?src-supplier=RSComponents, ComponentLink1URL=https://datasheet.ciiva.com/11809/0900766b80d98afc-11809140.pdf?src-supplier=RSComponents, ComponentLink2Description=https://datasheet.ciiva.com/7673/1697337-7673317.pdf?src-supplier=Element14, ComponentLink2URL=https://datasheet.ciiva.com/7673/1697337-7673317.pdf?src-supplier=Element14, ComponentLink3Description=https://datasheet.ciiva.com/5543/dcrcwe3-109170-5543895.pdf?src-supplier=Mouser, ComponentLink3URL=https://datasheet.ciiva.com/5543/dcrcwe3-109170-5543895.pdf?src-supplier=Mouser, ComponentLink4Description=https://datasheet.ciiva.com/22708/1697337-22708425.pdf?src-supplier=Element14, ComponentLink4URL=https://datasheet.ciiva.com/22708/1697337-22708425.pdf?src-supplier=Element14, ComponentLink5Description=https://datasheet.ciiva.com/2513/dcrcwe3-2513674.pdf?src-supplier=Digi-Key, ComponentLink5URL=https://datasheet.ciiva.com/2513/dcrcwe3-2513674.pdf?src-supplier=Digi-Key, ComponentLink6Description=https://datasheet.ciiva.com/2513/dcrcwe3-2513675.pdf?src-supplier=Digi-Key, ComponentLink6URL=https://datasheet.ciiva.com/2513/dcrcwe3-2513675.pdf?src-supplier=Digi-Key, ComponentLink7Description=https://datasheet.ciiva.com/2513/dcrcwe3-2513676.pdf?src-supplier=Digi-Key, ComponentLink7URL=https://datasheet.ciiva.com/2513/dcrcwe3-2513676.pdf?src-supplier=Digi-Key, ComponentLink8Description=https://datasheet.ciiva.com/8924/dcrcwe3-8924030.pdf?src-supplier=Avnet, ComponentLink8URL=https://datasheet.ciiva.com/8924/dcrcwe3-8924030.pdf?src-supplier=Avnet, ComponentLink9Description=https://datasheet.ciiva.com/16768/70201119-16768654.pdf?src-supplier=Allied+Electronics, ComponentLink9URL=https://datasheet.ciiva.com/16768/70201119-16768654.pdf?src-supplier=Allied+Electronics, Composition="Thick Film", Contact Plating=Tin, Depth=0.85mm, Features="Automotive AEC-Q200", Height=0.45mm, Lead Free="Lead Free", Length=1.55mm, Manufacturer Part Number=CRCW0603680KFKEA, Military Standard=Not, Number of Pins=2, Number of Terminations=2, Packaging="Tape and Reel", Power Rating=100mW, Price=0.0165, Pricing="10=0.0212, 100=0.0163, 500=0.0141, 1000=0.008 (EUR)", Radiation Hardening=No, REACH SVHC=Unknown, RoHS=Yes, Stock=23306, Supplier 1=Farnell, Termination=SMD/SMT, Voltage Rating (DC)=75V, Weight=7.1E-05oz, Width=0.85mm
R13: library part CRCW06036K80FKEA, "RES SMD 6.8K OHM 1% 1/10W 0603", Case/Package=0603, Case Code (Metric)=1608, Manufacturer=Vishay, Max Operating Temperature=155°C, Max Power Dissipation=100mW, Min Operating Temperature=-55°C, Package Quantity=10, Resistance=6.8kR, Supplier Part Number 1=1469831, Temperature Coefficient=100ppm/°C, Tolerance=1%, Voltage Rating=75V, Case Code (Imperial)=0603, ComponentLink1Description=https://datasheet.ciiva.com/11811/0900766b80d98afc-11811920.pdf?src-supplier=RSComponents, ComponentLink1URL=https://datasheet.ciiva.com/11811/0900766b80d98afc-11811920.pdf?src-supplier=RSComponents, ComponentLink2Description=https://datasheet.ciiva.com/2465/dcrcwe3-2465684.pdf?src-supplier=Digi-Key, ComponentLink2URL=https://datasheet.ciiva.com/2465/dcrcwe3-2465684.pdf?src-supplier=Digi-Key, ComponentLink3Description=https://datasheet.ciiva.com/22870/70201119-22870027.pdf?src-supplier=Allied+Electronics, ComponentLink3URL=https://datasheet.ciiva.com/22870/70201119-22870027.pdf?src-supplier=Allied+Electronics, ComponentLink4Description=https://datasheet.ciiva.com/2465/dcrcwe3-2465685.pdf?src-supplier=Digi-Key, ComponentLink4URL=https://datasheet.ciiva.com/2465/dcrcwe3-2465685.pdf?src-supplier=Digi-Key, ComponentLink5Description=https://datasheet.ciiva.com/2465/dcrcwe3-2465686.pdf?src-supplier=Digi-Key, ComponentLink5URL=https://datasheet.ciiva.com/2465/dcrcwe3-2465686.pdf?src-supplier=Digi-Key, ComponentLink6Description=https://datasheet.ciiva.com/3257/dcrcwe3-3257852.pdf?src-supplier=Avnet, ComponentLink6URL=https://datasheet.ciiva.com/3257/dcrcwe3-3257852.pdf?src-supplier=Avnet, ComponentLink7Description=https://datasheet.ciiva.com/16508/dcrcwe3-16508431.pdf?src-supplier=Future+Electronics, ComponentLink7URL=https://datasheet.ciiva.com/16508/dcrcwe3-16508431.pdf?src-supplier=Future+Electronics, ComponentLink8Description=https://datasheet.ciiva.com/26314/fld-crcw-e3-data-en-26314745.pdf?src-supplier=Distrelec, ComponentLink8URL=https://datasheet.ciiva.com/26314/fld-crcw-e3-data-en-26314745.pdf?src-supplier=Distrelec, ComponentLink9Description=https://datasheet.ciiva.com/16771/70201119-16771274.pdf?src-supplier=Allied+Electronics, ComponentLink9URL=https://datasheet.ciiva.com/16771/70201119-16771274.pdf?src-supplier=Allied+Electronics, ComponentLink10Description=https://datasheet.ciiva.com/7673/1697337-7673148.pdf?src-supplier=Element14, ComponentLink10URL=https://datasheet.ciiva.com/7673/1697337-7673148.pdf?src-supplier=Element14, ComponentLink11Description=https://datasheet.ciiva.com/3257/dcrcwe3-3257853.pdf?src-supplier=Avnet, ComponentLink11URL=https://datasheet.ciiva.com/3257/dcrcwe3-3257853.pdf?src-supplier=Avnet, Composition="Thick Film", Contact Plating=Tin, Depth=0.85mm, Features="Automotive AEC-Q200", Height=0.45mm, Lead Free="Lead Free", Length=1.55mm, Manufacturer Part Number=CRCW06036K80FKEA, Military Standard=Not, Number of Terminations=2, Packaging="Tape and Reel", Power Rating=100mW, Price=0.0093, Pricing="10=0.0111, 100=0.0092, 500=0.0084, 1000=0.0061 (EUR)", Radiation Hardening=No, REACH SVHC=Unknown, RoHS=Yes, Stock=33883, Supplier 1=Farnell, Termination=SMD/SMT, Voltage Rating (DC)=75V, Weight=7.1E-05oz, Width=0.033inch
R15: library part CRCW0603220KFKEA, "RES SMD 220K OHM 1% 1/10W 0603", Case/Package=0603, Case Code (Metric)=1608, Manufacturer=Vishay, Max Operating Temperature=155°C, Max Power Dissipation=100mW, Min Operating Temperature=-55°C, Package Quantity=10, Resistance=220kR, Supplier Part Number 1=1469783, Temperature Coefficient=100ppm/°C, Tolerance=1%, Voltage Rating=75V, Case Code (Imperial)=0603, ComponentLink1Description=https://datasheet.ciiva.com/11810/0900766b80d98afc-11810043.pdf?src-supplier=RSComponents, ComponentLink1URL=https://datasheet.ciiva.com/11810/0900766b80d98afc-11810043.pdf?src-supplier=RSComponents, ComponentLink2Description=https://datasheet.ciiva.com/22870/70201119-22870101.pdf?src-supplier=Allied+Electronics, ComponentLink2URL=https://datasheet.ciiva.com/22870/70201119-22870101.pdf?src-supplier=Allied+Electronics, ComponentLink3Description=https://datasheet.ciiva.com/16775/70201119-16775304.pdf?src-supplier=Allied+Electronics, ComponentLink3URL=https://datasheet.ciiva.com/16775/70201119-16775304.pdf?src-supplier=Allied+Electronics, ComponentLink4Description=https://datasheet.ciiva.com/2465/dcrcwe3-2465579.pdf?src-supplier=Digi-Key, ComponentLink4URL=https://datasheet.ciiva.com/2465/dcrcwe3-2465579.pdf?src-supplier=Digi-Key, ComponentLink5Description=https://datasheet.ciiva.com/2465/dcrcwe3-2465581.pdf?src-supplier=Digi-Key, ComponentLink5URL=https://datasheet.ciiva.com/2465/dcrcwe3-2465581.pdf?src-supplier=Digi-Key, ComponentLink6Description=https://datasheet.ciiva.com/16883/dcrcwe3-16883373.pdf?src-supplier=Avnet+Europe, ComponentLink6URL=https://datasheet.ciiva.com/16883/dcrcwe3-16883373.pdf?src-supplier=Avnet+Europe, ComponentLink7Description=https://datasheet.ciiva.com/7673/1697337-7673294.pdf?src-supplier=Element14, ComponentLink7URL=https://datasheet.ciiva.com/7673/1697337-7673294.pdf?src-supplier=Element14, ComponentLink8Description=https://datasheet.ciiva.com/26317/fld-crcw-e3-data-en-26317173.pdf?src-supplier=Distrelec, ComponentLink8URL=https://datasheet.ciiva.com/26317/fld-crcw-e3-data-en-26317173.pdf?src-supplier=Distrelec, ComponentLink9Description=https://datasheet.ciiva.com/5551/dcrcwe3-109170-5551287.pdf?src-supplier=Mouser, ComponentLink9URL=https://datasheet.ciiva.com/5551/dcrcwe3-109170-5551287.pdf?src-supplier=Mouser, ComponentLink10Description=https://datasheet.ciiva.com/2465/dcrcwe3-2465580.pdf?src-supplier=Digi-Key, ComponentLink10URL=https://datasheet.ciiva.com/2465/dcrcwe3-2465580.pdf?src-supplier=Digi-Key, ComponentLink11Description=https://datasheet.ciiva.com/3257/dcrcwe3-3257262.pdf?src-supplier=Avnet, ComponentLink11URL=https://datasheet.ciiva.com/3257/dcrcwe3-3257262.pdf?src-supplier=Avnet, Composition="Thick Film", Contact Plating=Tin, Depth=0.85mm, Features="Automotive AEC-Q200", Height=0.45mm, Lead Free="Lead Free", Length=1.55mm, Manufacturer Part Number=CRCW0603220KFKEA, Military Standard=Not, Number of Terminations=2, Packaging="Tape and Reel", Power Rating=100mW, Price=0.0093, Pricing="10=0.0212, 100=0.0163, 500=0.0141, 1000=0.008 (EUR)", Radiation Hardening=No, REACH SVHC=Unknown, RoHS=Yes, Stock=34686, Supplier 1=Farnell, Termination=SMD/SMT, Voltage Rating (DC)=75V, Weight=7.1E-05oz, Width=0.85mm